# Altium PCB 20K Control Board V1.1.PcbDoc (part 4 of 24)
Units mm, origin at the board's own origin, x right, y up, seen from the top; angles counter-clockwise.
Board outline 132 x 260 mm, 4 copper layers (Top Layer, GND, VCC, Bottom Layer); 1384 components, 779 nets, 4515 pads, 1774 vias.
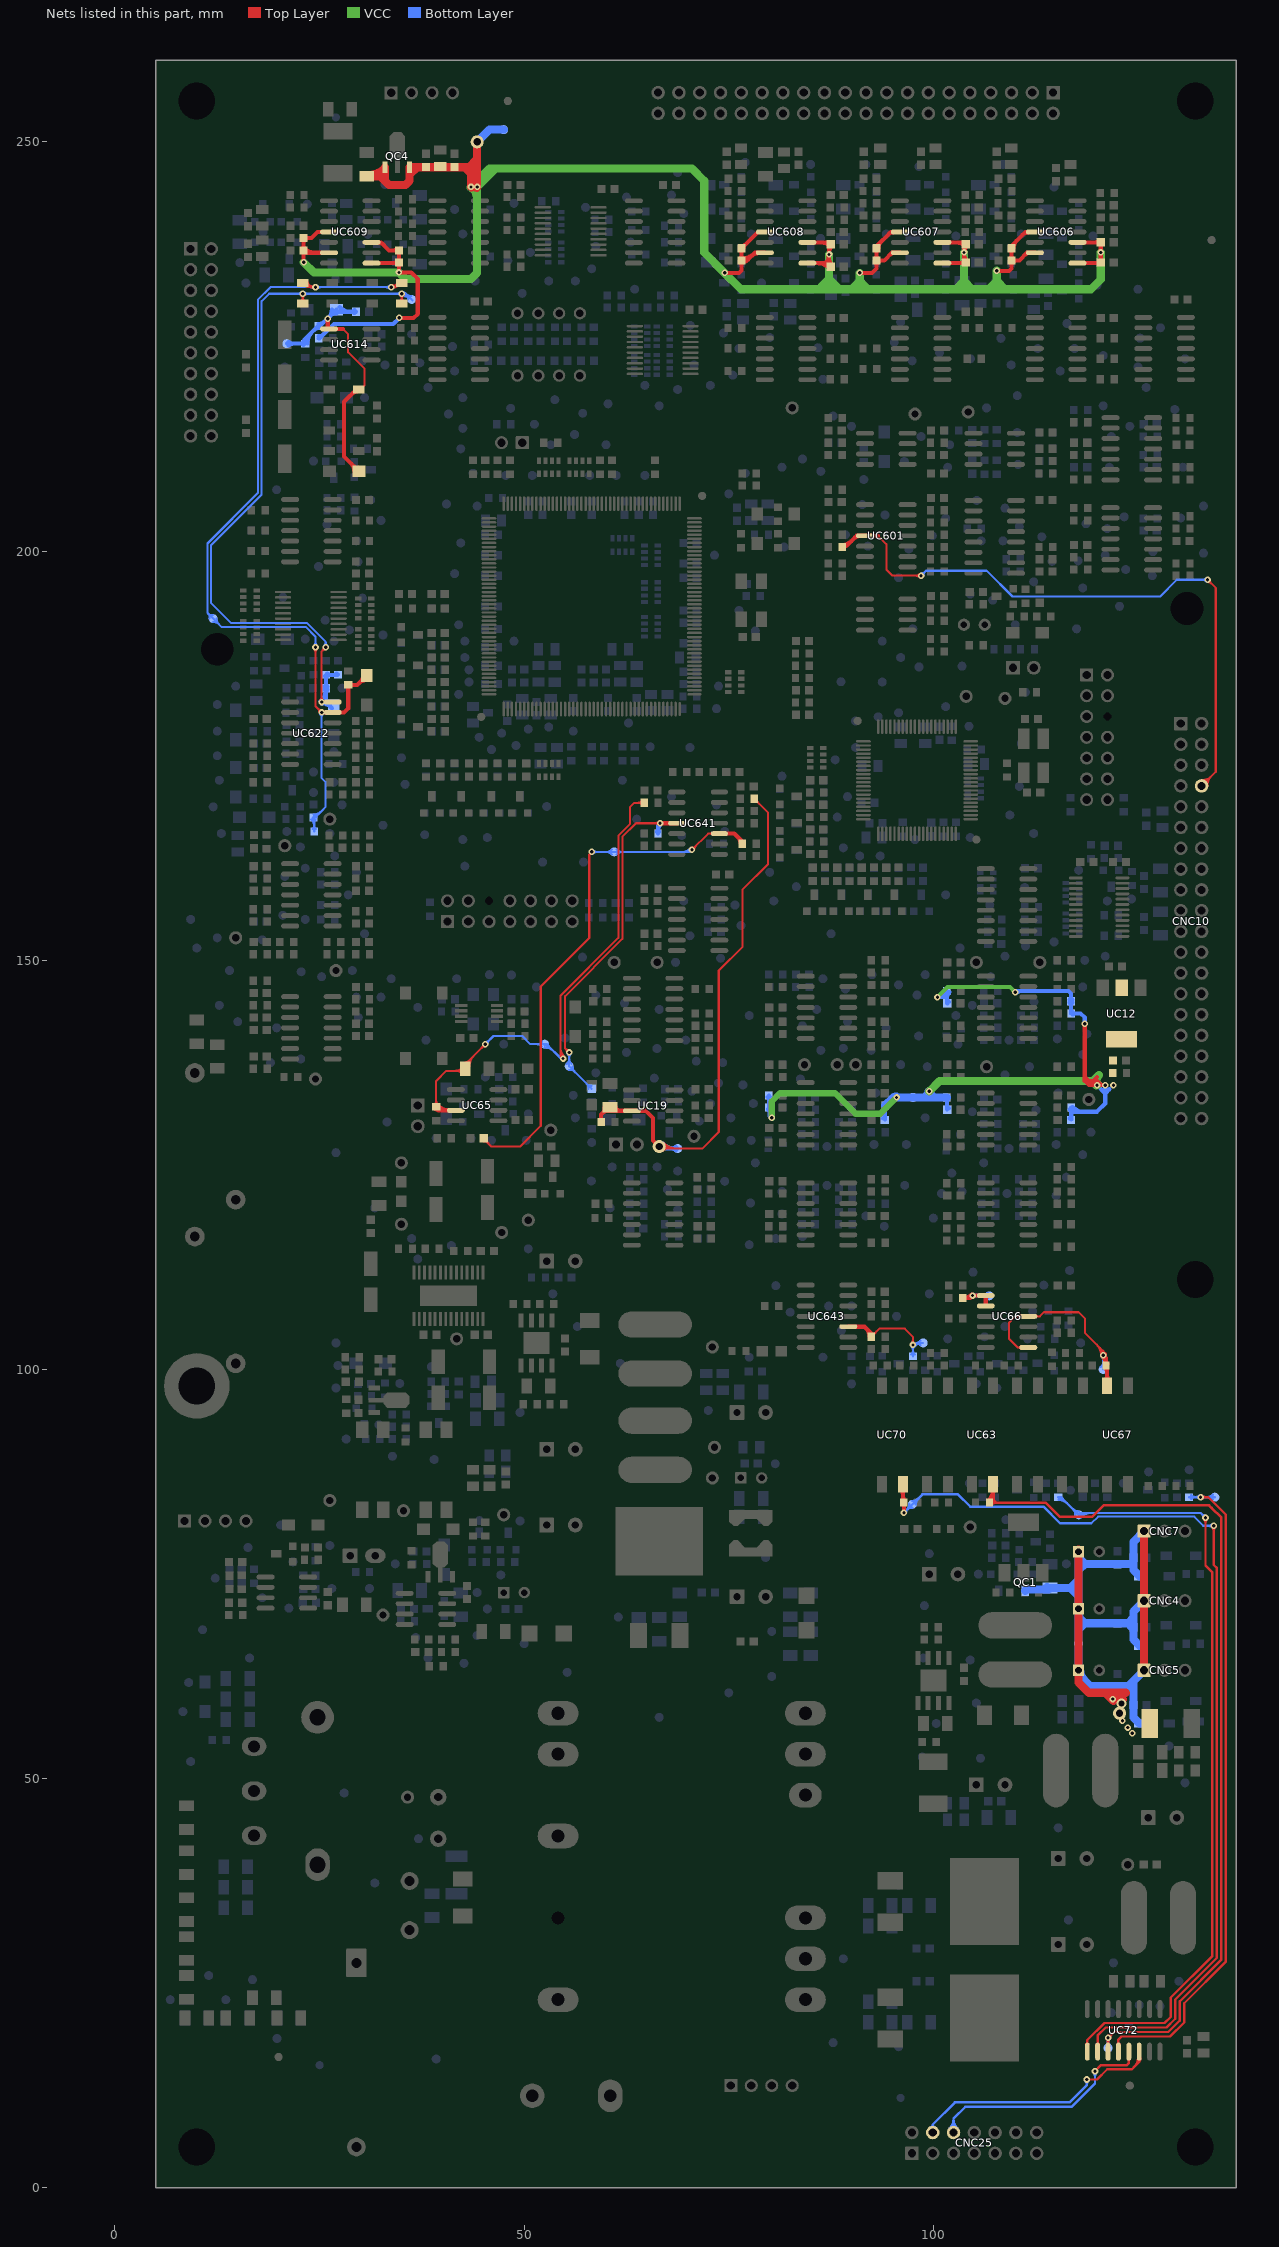
[diagram p6: the nets of this part, all layers, seen from the top]

## Via types
v1: diameter 0.8, hole 0.4, Top Layer to Bottom Layer, tented both sides, 1354 vias
v2: diameter 1.2, hole 0.7, Top Layer to Bottom Layer, 261 vias
v3: diameter 0.8, hole 0.4, Top Layer to Bottom Layer, 58 vias
v4: diameter 1.2, hole 0.7, Top Layer to Bottom Layer, tented top, 58 vias
v5: diameter 0.8, hole 0.4, Top Layer to Bottom Layer, tented top, 22 vias
v6: diameter 1.2, hole 0.7, Top Layer to Bottom Layer, tented both sides, 13 vias
v7: diameter 1.2, hole 0.7, Top Layer to Bottom Layer, tented bottom, 8 vias

## Nets (pads, with @x,y where several pads share a name; then routed paths per layer and width w, separated by ;. In a path a pad name is that pad's centre, name@x,y a point inside that pad or via, vN(x,y) a via of type N, cw(c..) or ccw(c..) an arc to the next point about the centre after c; other vN are vias at no path point)
1.5VREF: CC10.2 CC14.2 CC36.2 CC37.2 CC53.2 CC69.2 CC79.1 pad.ICT@97.5,133.25 RC25.2 RC29.2 RC61.1 RC64.1 RC100.2 RC140.1 RC158.2 UC12.2 | length 132.7
  Top Layer w0.5: v1(118.5,142.25) 118.5,135.75 ; 119,135.25 118.5,135.75 ; 119.827,135.25 cw(c119.827,134.725) v1@120.346,134.8 ; v1@119.852,134.729 ccw(c119.25,134.642) 119.25,135.25 ; 120,135.25 119.25,135.25 ; 120,135.75 119.5,135.25 119.25,135.25 ; v1(121,134.75) v1(120,134.75) 119,134.75 118.5,135.25 ; 118.5,135.25 118.5,135.75 ; 118.5,135.25 119.25,135.25
  VCC w0.5: v1(100.5,145.5) 101.75,146.75 109.35,146.75 v1(110,146.1)
  VCC w0.75: v1(80.25,130.75) 80.25,132.75 81.25,133.75 88,133.75 90.5,131.25 93.5,131.25 v1(95.5,133.25)
  VCC w1: v1(99.5,134) 100.75,135.25 119.5,135.25 ; 119.034,135.25 cw(c119.034,133.784) v1@120.071,134.821 ; v1@119.903,134.725 cw(c121.19,135.06) 120.25,136 119.5,135.25 ; v1(120,134.75) 119.5,135.25 ; v1@120.098,134.772 ccw(c119.5,134.638) 119.5,135.25
  Bottom Layer w0.5: RC100.2@79.759,133.309 cw(c79.417,132.967) 79.9,132.967 cw(c80.383,132.967) RC100.2@80.041,133.309 ; CC53.2@79.773,131.823 cw(c79.226,131.276) 80,131.276 ; CC53.2@79.9,132.05 RC100.2@79.9,133.5 ; 79.9,132.724 ccw(c80.674,132.724) CC53.2@80.127,132.177 ; v1@80,131 CC53.2@80,131.8 ; CC53.2@80,131.716 ccw(c81.216,131.716) v1@80.356,130.856 ; CC69.2@93.873,130.677 ccw(c93.326,131.224) 94.1,131.224 ; RC140.1@93.959,132.059 cw(c93.617,131.717) 94.1,131.717 cw(c94.583,131.717) RC140.1@94.241,132.059 ; CC69.2@94.1,130.55 RC140.1@94.1,132.25 ; v1(100.5,145.5) 101.65,145.5 ; v1(100.5,145.5) ccw(c100.5,146.485) RC29.2@101.456,146.248 ; 101.139,145.5 ccw(c101.139,146.327) RC29.2@101.941,146.128 ; RC25.2@101.509,133.059 cw(c101.167,132.717) 101.65,132.717 cw(c102.133,132.717) RC25.2@101.791,133.059 ; CC10.2@101.65,131.8 RC25.2@101.65,133.25 ; 101.65,132.474 ccw(c102.424,132.474) CC10.2@101.877,131.927 ; CC14.2@101.65,144.8 101.65,145.5 ; 101.65,145.474 ccw(c102.424,145.474) CC14.2@101.877,144.927 ; RC29.2@101.65,146.25 101.65,145.5 ; CC14.2@101.7,144.75 CC14.2@101.75,144.7 ; v1(110,146.1) 110.15,146.25 116.5,146.25 116.8,145.95 CC37.2@116.8,145 RC64.1@116.8,143.55 ; v1@110.106,145.994 cw(c110.724,145.376) 110.724,146.25 ; CC36.2@116.623,130.677 ccw(c116.076,131.224) 116.85,131.224 ; CC37.2@116.623,144.823 cw(c116.196,144.396) 116.8,144.396 cw(c117.404,144.396) CC37.2@116.977,144.823 ; CC37.2@116.623,145.177 ccw(c116.196,145.604) 116.8,145.604 ccw(c117.404,145.604) CC37.2@116.977,145.177 ; RC61.1@116.638,131.738 ccw(c117.212,132.312) RC61.1@117.212,131.5 ; RC61.1@116.709,131.809 cw(c116.367,131.467) 116.85,131.467 cw(c117.333,131.467) RC61.1@116.991,131.809 ; 116.8,144.154 ccw(c117.454,144.154) RC64.1@116.991,143.691 ; CC36.2@116.85,130.55 RC61.1@116.85,132 ; RC61.1@116.85,131.5 120,131.5 121,132.5 121,133.75 ; RC64.1@116.85,143.5 118,143.5 118.5,143 v1(118.5,142.25) ; RC61.1@116.991,132.091 ccw(c118.419,133.519) 118.419,131.5 ; RC64.1@116.991,143.359 cw(c117.333,143.017) 117.333,143.5 cw(c117.333,143.983) RC64.1@116.991,143.641 ; v1(120,134.75) 121,133.75 ; v1(121,134.75) 121,133.75 ; 121.5,134.25 121,133.75 ; RC29.2@101.509,146.059 cw(c101.167,145.717) 101.65,145.717 ; RC29.2@101.509,146.059 cw(c101.167,145.717) 101.65,145.717 ; RC29.2@101.509,146.059 cw(c101.167,145.717) 101.65,145.717 ; RC29.2@101.509,146.059 cw(c101.167,145.717) 101.65,145.717 ; 101.65,145.717 cw(c102.133,145.717) RC29.2@101.791,146.059 ; 101.65,145.717 cw(c102.133,145.717) RC29.2@101.791,146.059 ; 101.65,145.717 cw(c102.133,145.717) RC29.2@101.791,146.059 ; 101.65,145.717 cw(c102.133,145.717) RC29.2@101.791,146.059
  Bottom Layer w0.75: 98.75,133.25 v1(99.5,134) 100.25,133.25
  Bottom Layer w1: RC140.1@94.1,132.25 95.1,133.25 v1(95.5,133.25) 98.75,133.25 ; 94.988,133.138 cw(c95.5,132.626) v1@95.5,133.35 ; v1@99.401,133.986 ccw(c100.25,134.108) 100.25,133.25 ; v1@99.599,133.986 cw(c98.75,134.108) 98.75,133.25 ; RC25.2@101.65,133.25 100.25,133.25 ; 98.75,133.25 100.25,133.25
  other v1: 122,134.75
2V5_REF: CC142.2 CC191.1 CC192.1 CC213.1 CC215.1 CC217.2 CC219.1 CC231.1 CC232.1 CC240.1 CC241.1 CC242.1 CC243.1 CC252.2 CC348.2 CC350.1 CC351.1 CC352.1 CC355.1 pad.ICT@47.5,251.5 QC4.1 QC4.3 RC322.1 RC339.1 TP38.1 UC606.4 UC606.6 UC606.8 UC606.10 UC607.4 UC607.6 UC607.8 UC607.10 UC608.4 UC608.6 UC608.8 UC608.10 UC609.4 UC609.6 UC609.8 UC609.10 | length 355.4
  Top Layer w0.5: CC355.1@22.873,236.573 cw(c22.446,236.146) 23.05,236.146 cw(c23.654,236.146) CC355.1@23.227,236.573 ; CC355.1@22.873,236.927 ccw(c22.446,237.354) 23.05,237.354 ccw(c23.654,237.354) 23.227,236.927 ccw(c24.354,238.054) 24.354,236.46 ; CC350.1@22.873,238.073 cw(c22.446,237.646) 23.05,237.646 cw(c23.654,237.646) 23.227,238.073 cw(c23.654,237.646) 23.654,238.25 cw(c23.654,238.854) CC350.1@23.227,238.427 ; v1(23.05,235.3) CC355.1@23.05,236.75 ; CC355.1@23.46,236.75 23.75,236.46 ; UC609.6@26.15,236.46 23.75,236.46 ; UC609.4@26.15,239 24.75,239 24,238.25 CC350.1@23.05,238.25 CC355.1@23.05,236.75 ; UC609.8@31.35,235.19 CC243.1@34.7,235.19 ; UC609.10@31.35,237.73 32.52,237.73 33.5,236.75 CC219.1@34.7,236.75 CC243.1@34.7,235.25 CC243.1@34.7,235.19 ; UC609.10@32.15,237.68 cw(c32.15,236.666) 32.867,237.383 ; UC609.10@32.164,237.682 cw(c32.32,237.16) 32.705,237.545 ; 33.952,235.19 ccw(c33.952,235.998) 34.523,235.427 ccw(c34.096,235.854) 34.7,235.854 ccw(c35.304,235.854) CC243.1@34.877,235.427 ; CC243.1@34.523,235.073 cw(c34.096,234.646) 34.7,234.646 cw(c35.304,234.646) CC243.1@34.877,235.073 ; CC219.1@34.523,236.927 cw(c34.096,237.354) 34.096,236.75 cw(c34.096,236.146) 34.523,236.573 cw(c34.096,236.146) 34.7,236.146 cw(c35.304,236.146) CC219.1@34.877,236.573 ; v1(34.75,228.5) 36.5,228.5 37,229 37,233.25 36.2,234.05 v1(34.7,234.05) CC243.1@34.7,235.19 ; v1(74.5,234) 76.25,234 76.55,234.3 CC252.2@76.55,235.5 ; CC252.2@76.373,235.323 cw(c75.946,234.896) 76.55,234.896 cw(c77.154,234.896) 76.727,235.323 cw(c77.154,234.896) 77.154,235.5 cw(c77.154,236.104) 76.727,235.677 cw(c77.154,236.104) 76.55,236.104 cw(c75.946,236.104) CC252.2@76.373,235.677 ; CC232.1@76.373,236.823 cw(c75.946,236.396) 76.55,236.396 cw(c77.154,236.396) CC232.1@76.727,236.823 ; CC252.2@76.55,235.25 ccw(c76.55,236.336) 77.318,235.568 ; CC252.2@76.55,235.75 ccw(c76.55,238.043) 78.172,236.422 ; CC232.1@76.55,237.25 ccw(c76.55,237.854) 76.977,237.427 ccw(c77.404,237) CC232.1@76.8,237 ; 77.849,236.099 cw(c78.6,235.348) UC608.6@78.6,236.41 ; 78.015,236.265 cw(c78.425,235.855) UC608.6@78.586,236.412 ; UC608.6@79.4,236.46 78.21,236.46 77.25,235.5 CC252.2@76.55,235.5 ; UC608.4@79.4,239 78.55,239 CC232.1@76.55,237 CC252.2@76.55,235.5 ; UC608.8@84.6,235.19 86.75,235.19 ; UC608.10@84.6,237.73 CC242.1@87.22,237.73 ; 85.784,235.19 cw(c85.784,233.084) CC215.1@87.273,234.573 ; 86.291,237.73 cw(c86.291,236.341) CC242.1@87.273,237.323 ; CC215.1@86.991,235.19 cw(c86.991,234.291) 87.627,234.927 cw(c88.536,235.836) 87.25,235.836 ; 87.03,235.47 ccw(c86.619,235.881) v1@87.121,236.174 ; CC215.1@87.25,234.75 CC242.1@87.25,237.5 ; 87.25,235.69 86.75,235.19 ; v1@87.25,236.414 cw(c88.536,236.414) CC242.1@87.627,237.323 ; CC215.1@87.45,234.75 87.01,235.19 86.75,235.19 ; v1(91,234) 92.5,234 93.05,234.55 CC240.1@93.05,235.5 ; CC240.1@92.873,235.323 cw(c92.446,234.896) 93.05,234.896 cw(c93.654,234.896) 93.227,235.323 cw(c93.654,234.896) 93.654,235.5 cw(c93.654,236.104) 93.227,235.677 cw(c93.654,236.104) 93.05,236.104 cw(c92.446,236.104) CC240.1@92.873,235.677 ; CC352.1@92.873,236.823 cw(c92.446,236.396) 93.05,236.396 cw(c93.654,236.396) CC352.1@93.227,236.823 ; CC352.1@93.3,237 cw(c94.512,237) 93.655,237.857 ; 94.499,238.701 cw(c95.1,238.1) UC607.4@95.1,238.95 ; 94.647,238.849 cw(c94.95,238.546) UC607.4@95.084,238.953 ; 94.776,236.276 cw(c95.1,235.951) UC607.6@95.1,236.41 ; UC607.6@95.9,236.46 94.96,236.46 94,235.5 CC240.1@93.05,235.5 ; UC607.4@95.9,239 94.798,239 93.05,237.252 CC352.1@93.05,237 CC240.1@93.05,235.5 ; UC607.8@101.1,235.19 103.69,235.19 103.75,235.25 103.75,237.7 103.72,237.73 UC607.10@101.1,237.73 ; 102.791,237.73 cw(c102.791,236.341) CC213.1@103.773,237.323 ; 103.202,235.19 ccw(c103.202,235.998) CC351.1@103.773,235.427 ; v1@103.75,236.336 ccw(c105.036,236.336) CC351.1@104.127,235.427 ; v1@103.75,236.414 cw(c105.036,236.414) CC213.1@104.127,237.323 ; v1(107.75,234.25) 109.25,234.25 109.55,234.55 CC241.1@109.55,235.5 ; CC241.1@109.373,235.323 cw(c108.946,234.896) 109.55,234.896 cw(c110.154,234.896) 109.727,235.323 cw(c110.154,234.896) 110.154,235.5 cw(c110.154,236.104) 109.727,235.677 cw(c110.154,236.104) 109.55,236.104 cw(c108.946,236.104) CC241.1@109.373,235.677 ; CC217.2@109.373,236.823 cw(c108.946,236.396) 109.55,236.396 cw(c110.154,236.396) CC217.2@109.727,236.823 ; CC217.2@109.8,237 cw(c111.128,237) 110.189,237.939 ; 110.917,238.667 cw(c111.6,237.984) UC606.4@111.6,238.95 ; 111.075,238.825 cw(c111.436,238.464) UC606.4@111.585,238.952 ; 111.276,236.276 cw(c111.6,235.951) UC606.6@111.6,236.41 ; UC606.4@111.55,239 UC606.4@112.4,239 111.25,239 109.55,237.3 CC217.2@109.55,237 CC241.1@109.55,235.5 ; UC606.6@112.4,236.46 111.46,236.46 110.5,235.5 CC241.1@109.55,235.5 ; UC606.8@117.6,235.19 120.14,235.19 120.45,235.5 CC142.2@120.45,237.75 ; UC606.10@117.6,237.73 CC142.2@120.43,237.73 ; 119.702,235.19 ccw(c119.702,235.998) 120.273,235.427 ccw(c119.846,235.854) 120.45,235.854 ccw(c121.054,235.854) CC231.1@120.627,235.427 ; 119.798,237.73 ccw(c119.798,238.402) CC142.2@120.273,237.927 ; 119.895,237.73 cw(c119.895,237.195) 120.273,237.573 cw(c119.846,237.146) 120.45,237.146 cw(c121.054,237.146) CC142.2@120.627,237.573 ; CC355.1@23.05,236.75 23.34,236.46 23.75,236.46 ; 23.75,236.46 cw(c23.75,236.934) 23.292,236.813 ccw(c23.75,236.934) 23.75,236.46 ; 86.75,235.19 cw(c86.75,234.74) 87.2,234.746 ccw(c86.75,234.74) 86.75,235.19
  Top Layer w1: RC322.1@30.75,245.8 32,245.8 ; RC322.1@31,245.95 ccw(c31,248.726) QC4.1@32.963,246.763 ; QC4.1@32.854,246.637 ccw(c33.517,246.017) 32.875,245.375 ; 33,245.8 32,245.8 ; QC4.1@33,246.8 32,245.8 ; QC4.1@33,246.9 33,245.25 33.5,244.75 ; 36.95,246.95 36,246 ; 42.75,246.9 43.5,246.15 v1(43.5,244.5) v1(44.25,244.5) 44.25,246.9 ; 43.5,245.25 ccw(c44.358,245.25) v1@44.236,244.401 ; 43.5,246.069 ccw(c45.819,246.069) v1@44.179,244.429 ; v1@43.571,244.429 ccw(c41.931,246.069) 44.25,246.069 ; 44.25,247.9 43.25,246.9 ; TP38.1@44.25,250 44.25,246.9 ; 32,245.8 32.45,245.8 33.5,244.75 ; 33.5,244.75 35.5,244.75 36,245.25 36,246 ; 36,246 QC4.3@36,246.9 43.25,246.9 ; 43.25,246.9 44.25,246.9
  VCC w1: v1(23.05,235.3) 24.3,234.05 v1(34.7,234.05) 35.5,233.25 43.5,233.25 44.25,234 v1(44.25,244.5) ; v1@43.445,244.416 ccw(c43.796,244.954) v1(44.25,244.5) ; v1@43.5,244.4 ccw(c43.5,245.969) 44.61,244.86 ; v1@43.514,244.599 cw(c43.392,243.75) 44.25,243.75 v1(43.5,244.5) 45.75,246.75 46.5,246.75 ; v1@43.571,244.571 cw(c41.931,242.931) 44.25,242.931 ; v1@44.15,244.5 cw(c45.719,244.5) 44.61,245.61 ; 86.25,232.25 87.25,233.25 88.25,232.25 ; 87.25,232.5 v1(87.25,236.25) ; 90,232 91,233 92,232 ; 91,232.25 v1(91,234) ; 102.75,232 103.75,233 ; 103.75,232.25 103.75,233 ; v1(103.75,236.5) 103.75,233 ; 104.75,232 103.75,233 ; 106.75,232 107.75,233 108.75,232 ; 107.75,232.25 v1(107.75,234.25) ; v1(120.45,236.5) 120.45,233.2 119.25,232 76.5,232 v1(74.5,234) 72,236.5 72,245.25 70.5,246.75 46.5,246.75 ; v1(44.25,244.5) 46.5,246.75
  Bottom Layer w0.5: RC339.1@24.9,226 25,226 26.75,227.75 ; RC339.1@24.9,226.25 ccw(c24.9,227.095) 25.497,226.497 ; 28,227.75 26.75,227.75 ; v1(34.75,228.5) 34,227.75 26.75,227.75
  Bottom Layer w1: TP38.1@44.25,250 45.75,251.5 pad.ICT@47.5,251.5
12V-UVP: CC202.2 DC32.2 DC33.2 DC44.2 pad.ICT@21,225.35 RC340.1 RC346.2 UC614.1 | length 47.8
  Top Layer w0.25: 27.845,227.155 28.5,226.5 28.5,224.275 30.5,222.275 30.5,220.25 DC44.2@30.25,220
  Top Layer w0.5: UC614.1@26,227.155 v1(26,228.4) ; 26,227.638 ccw(c26.633,227.638) UC614.1@26.185,227.19 ; UC614.1@26.15,227.155 27.845,227.155 ; 28.861,210.689 cw(c27.922,209.75) DC33.2@29.25,209.75 ; 29.003,219.253 cw(c29.6,218.655) DC44.2@29.6,219.5 ; DC33.2@29.103,210.447 ccw(c29.7,211.045) DC33.2@29.7,210.2 ; DC33.2@29.8,209.75 28,211.55 28,218.25 29.55,219.8 DC44.2@29.8,219.8
  Bottom Layer w0.5: pad.ICT@21,225.35 RC346.2@23.25,225.35 23.25,225.936 RC340.1@24.814,227.5 ; pad.ICT@21.212,225.138 cw(c21.724,224.626) 21.724,225.35 cw(c21.724,226.074) pad.ICT@21.212,225.562 ; RC346.2@23,225.35 cw(c23.812,225.35) 23.238,225.924 ; RC346.2@23.059,225.209 ccw(c22.717,224.867) 22.717,225.35 ccw(c22.717,225.833) RC346.2@23.059,225.491 ; RC346.2@23.109,225.491 ccw(c22.767,225.833) 23.25,225.833 ccw(c23.733,225.833) RC346.2@23.391,225.491 ; RC346.2@23.5,225.35 cw(c25.519,225.35) 24.091,226.778 ; 24.361,227.047 cw(c24.85,226.559) RC340.1@24.85,227.25 ; RC340.1@24.832,227.518 RC340.1@24.814,227.5 ; RC340.1@24.85,227.75 ccw(c24.85,228.836) 25.618,228.068 ; 25.659,228.109 cw(c26,227.767) v1@26,228.25 ; v1@26.111,228.561 ccw(c25.172,229.5) DC32.2@26.5,229.5 ; v1@26.15,228.4 cw(c26.633,228.4) 26.291,228.741 ; DC32.2@26.353,228.803 cw(c26.95,228.205) DC32.2@26.95,229.05 ; DC32.2@27.05,229.05 DC32.2@27.05,229.5 25.05,227.5 RC340.1@24.85,227.5 RC340.1@24.814,227.5 ; DC32.2@27.3,229.25 CC202.2@29.45,229.25 ; DC32.2@27.468,229.818 ccw(c28.84,231.19) 28.84,229.25 ; CC202.2@29.273,229.073 ccw(c28.846,228.646) 28.846,229.25 ccw(c28.846,229.854) CC202.2@29.273,229.427
12V_FANOUT: 12V_FANOUT.1 CC22.1 CC25.1 CC28.1 CC50.1 CC51.2 CC74.2 CC81.1 CC194.2 CC197.1 CNC4.1 CNC5.1 CNC7.1 DC3.2 DC4.2 DC5.2 FA2.1 pad.ICT@117.73,66.5 QC1.3 RC47.2 | length 122.7
  Top Layer w1: CC197.1@117.73,78 CC81.1@117.73,70.75 CC50.1@117.73,63.25 117.73,61.77 119,60.5 121,60.5 ; 121.198,60.5 cw(c121.198,57.698) v6@123.179,59.679 ; 121.402,60.098 ccw(c122,60.696) v1@122,59.85 ; v1(121.901,59.734) ccw(c121,59.587) 121,60.5 ; v1@122,59.5 121,60.5 ; v1@122.086,59.699 cw(c123.5,58.852) 123.5,60.5 121,60.5 ; CNC5.1@125.75,63.25 CNC7.1@125.75,80.25
  Bottom Layer w1: QC1.3@111.215,72.968 111.35,73.103 114.053,73.103 RC47.2@114.25,73.3 116.75,73.3 ; 113.162,73.103 ccw(c113.162,74.138) RC47.2@113.894,73.406 ; 117.68,73.3 116.75,73.3 ; 117.73,68.23 118.5,69 ; 117.73,69.77 118.5,69 ; 117.73,72.32 116.75,73.3 ; 117.73,74.28 116.75,73.3 ; 117.73,75.48 118.5,76.25 ; 117.73,77.02 118.5,76.25 ; CC197.1@117.73,77.75 CC50.1@117.73,63.25 117.73,62.77 119.2,61.3 123.75,61.3 ; CC81.1@117.896,70.639 ccw(c118.654,70.134) 118.01,69.49 ; CC197.1@117.916,77.676 ccw(c118.832,77.312) 118.135,76.615 ; CC50.1@117.93,63.25 ccw(c119.572,63.25) 118.411,62.089 ; 123.8,61.3 124.45,61.95 ; 124.25,61.3 123.75,61.3 ; CC25.1@124.25,68.5 123.75,69 ; 124.45,60.6 123.75,61.3 ; 124.45,69 123.75,69 ; 124.45,69.7 123.75,69 ; DC5.2@125.2,56.75 124.45,57.5 CC28.1@124.45,59 124.45,61.95 ; DC3.2@125.2,66.25 124.45,67 124.45,70.45 CNC4.1@125.75,71.75 ; DC4.2@125.2,74.75 124.45,75.5 124.45,76.25 ; CNC5.1@125.75,63.25 124.45,61.95 ; CNC7.1@125.75,80.25 124.45,78.95 124.45,77.75 124.45,76.25 ; 118.5,69 123.75,69 ; 118.5,76.25 124.45,76.25
  other v1: 124.3,55.55 123.75,56.25 123.1,57.1
  other v6: 123,59.2
50MA.ON: CNC10.8 RC238.1 UC601.4 | length 88.9
  Top Layer w0.25: 93.239,201.875 94.25,200.864 94.25,197.75 95,197 v1(98.5,197) ; v1@98.306,196.806 ccw(c97.836,196.336) 97.836,197 ccw(c97.836,197.664) v1@98.306,197.194 ; CNC10.8@132.77,171.31 134.5,173.04 134.5,195.5 v1(133.5,196.5) ; CNC10.8@132.77,171.76 ccw(c132.77,172.846) 133.538,172.078 ccw(c134.306,171.31) CNC10.8@133.22,171.31 ; CNC10.8@132.77,172.01 ccw(c132.77,173.7) 133.965,172.505 ccw(c135.16,171.31) CNC10.8@133.47,171.31 ; v1@133.5,196.225 cw(c133.5,195.561) 133.969,196.031 cw(c134.439,196.5) v1@133.775,196.5
  Top Layer w0.5: RC238.1@88.85,200.75 ccw(c88.85,202.319) 89.96,201.21 ; RC238.1@88.969,200.711 ccw(c89.212,201.038) 89.5,200.75 ; RC238.1@89.029,200.46 cw(c89.5,200.222) 89.5,200.75 ; RC238.1@89.1,200.75 89.5,200.75 ; 90.381,201.631 cw(c90.85,201.161) UC601.4@90.85,201.825 ; 93.239,201.875 UC601.4@91.65,201.875 90.625,201.875 89.5,200.75
  Bottom Layer w0.25: v1(98.5,197) 99.1,197.6 106.514,197.6 109.664,194.45 127.7,194.45 129.75,196.5 v1(133.5,196.5) ; v1@98.5,197.275 ccw(c98.5,197.939) 98.969,197.469 ccw(c99.439,197) v1@98.775,197 ; v1@133.306,196.306 ccw(c132.836,195.836) 132.836,196.5 ccw(c132.836,197.164) v1@133.306,196.694
232-RX: pad.ICT@120.75,100 RC628.1 UC66.8 UC66.11 UC67.4 | length 44.5
  Top Layer w0.25: UC66.8@110.676,102.566 ccw(c110.378,102.268) 110.378,102.69 ccw(c110.378,103.112) UC66.8@110.676,102.814 ; UC66.11@110.676,106.376 ccw(c110.378,106.078) 110.378,106.5 ccw(c110.378,106.922) UC66.11@110.676,106.624 ; UC66.8@111.6,102.69 110.285,102.69 109.25,103.725 109.25,105.75 110,106.5 UC66.11@111.6,106.5 113,106.5 113.5,107 117.75,107 118.5,106.25 118.5,104.5 120.75,102.25 ; UC66.11@112.524,106.376 cw(c112.822,106.078) 112.822,106.5 cw(c112.822,106.922) UC66.11@112.524,106.624 ; 119.927,103.073 cw(c118.604,101.75) v1@120.475,101.75 ; 120.354,102.646 cw(c119.458,101.75) v1@120.725,101.75 ; v1@120.579,101.535 cw(c119.715,100.452) RC628.1@121.1,100.452 ; v1@120.603,101.982 ccw(c120.433,102.25) 120.75,102.25 ; 120.699,102.301 cw(c120.413,102.016) v1@120.73,101.765 ; v1@120.734,101.73 cw(c120.129,100.971) RC628.1@121.1,100.971 ; v1(120.75,101.75) 120.75,102.25 ; 120.781,102.219 cw(c120.311,101.75) v1@120.975,101.75 ; RC628.1@120.87,100.78 ccw(c120.315,101.335) 121.1,101.335 ccw(c121.885,101.335) RC628.1@121.33,100.78 ; v1@120.89,101.926 cw(c120.543,101.49) 121.1,101.49 ; v1@120.897,101.982 cw(c121.067,102.25) 120.75,102.25 ; RC628.1@121.1,100.5 121.1,101.9 120.75,102.25
  Top Layer w0.5: v1@120.644,101.644 cw(c119.543,100.543) RC628.1@121.1,100.543 ; v1(120.75,101.75) 121.1,101.4 RC628.1@121.1,100.5 ; RC628.1@120.959,100.309 cw(c120.303,99.653) 121.23,99.653 ; RC628.1@120.959,100.691 ccw(c120.617,101.033) 121.1,101.033 ccw(c121.583,101.033) RC628.1@121.241,100.691 ; UC67.4@120.983,98.647 ccw(c120.385,99.245) 121.23,99.245 ccw(c122.075,99.245) UC67.4@121.477,98.647 ; UC67.4@121.23,98 RC628.1@121.23,100.37
  Bottom Layer w0.25: pad.ICT@120.449,100.301 ccw(c119.724,101.026) 120.75,101.026 ccw(c121.776,101.026) pad.ICT@121.051,100.301 ; v1@120.556,101.556 cw(c120.086,101.086) 120.75,101.086 cw(c121.414,101.086) v1@120.944,101.556 ; pad.ICT@120.75,100 v1(120.75,101.75)
232-TX: pad.ICT@106.816,109 RC604.2 UC66.2 UC66.3 | length 9.1
  Top Layer w0.5: RC604.2@103.6,108.75 104.5,108.75 v1(104.79,109.04) UC66.2@106.4,109.04 UC66.3@106.4,107.77 ; RC604.2@103.728,108.75 ccw(c103.728,110.102) v1@104.684,109.146 ; RC604.2@103.741,108.609 cw(c104.083,108.267) 104.083,108.75 cw(c104.083,109.233) RC604.2@103.741,108.891
  Bottom Layer w0.5: v1(104.79,109.04) pad.ICT@106.776,109.04 ; 105.995,109.04 cw(c105.995,108.179) pad.ICT@106.603,108.788 ; 106.188,109.04 ccw(c106.188,109.628) pad.ICT@106.603,109.212
232-TX-TO-COM: pad.ICT@121.345,17.095 RC608.1 UC63.4 UC72.11 | length 118.8
  Top Layer w0.3: RC608.1@106.85,83.75 RC608.1@106.9,83.75 ; RC608.1@106.9,83.7 107.75,83.7 ; RC608.1@107.062,83.488 cw(c107.574,82.976) 107.574,83.7 cw(c107.574,84.424) RC608.1@107.062,83.912 ; 107.375,84.075 107.75,83.7 ; v1@121.168,18.168 cw(c120.741,17.741) 121.345,17.741 cw(c121.949,17.741) v1@121.522,18.168 ; UC72.11@121.239,17.556 ccw(c120.983,17.812) 121.345,17.812 ccw(c121.707,17.812) UC72.11@121.451,17.556 ; UC72.11@121.345,16.65 v1(121.345,18.345) 122.05,19.05 128.706,19.05 130.1,20.444 130.1,22.794 135.2,27.894 135.2,81.9 134,83.1 133.7,83.4 120.8,83.4 120.5,83.1 119.4,82 115.457,82 113.757,83.7 107.75,83.7 ; v1@121.345,18.595 ccw(c121.345,19.199) 121.772,18.772 ccw(c122.199,18.345) v1@121.595,18.345
  Top Layer w0.5: RC608.1@106.709,83.941 ccw(c105.353,85.297) UC63.4@107.27,85.297 ; RC608.1@106.85,83.75 107.27,84.17 UC63.4@107.27,86 ; UC63.4@107.023,85.353 cw(c106.425,84.755) 107.27,84.755 cw(c108.115,84.755) UC63.4@107.517,85.353 ; RC608.1@107.062,83.588 ccw(c106.56,84.09) RC608.1@107.27,84.09
  Bottom Layer w0.3: pad.ICT@121.062,17.378 ccw(c120.379,18.061) 121.345,18.061 ccw(c122.311,18.061) pad.ICT@121.628,17.378 ; v1@121.168,18.168 cw(c120.741,17.741) 121.345,17.741 cw(c121.949,17.741) v1@121.522,18.168 ; pad.ICT@121.345,17.095 v1(121.345,18.345)
#232-TX-TO-COM: CNC25.4 UC72.14 | length 35.1
  Top Layer w0.3: v1(118.75,13.25) 120,13.25 121.25,14.5 124.25,14.5 124.584,14.834 ; UC72.14@125.005,15.85 cw(c123.569,15.85) 124.584,14.834 ; UC72.14@125.049,15.744 cw(c124.793,15.488) 125.155,15.488 cw(c125.517,15.488) UC72.14@125.261,15.744 ; 125.096,15.346 ccw(c124.593,15.85) UC72.14@125.305,15.85 ; UC72.14@125.155,16.65 125.155,15.405 124.584,14.834
  Bottom Layer w0.3: CNC25.4@99.679,7.401 ccw(c99.546,7.75) 99.92,7.75 ; CNC25.4@99.92,6.77 99.92,7.75 ; CNC25.4@100.161,7.401 cw(c100.294,7.75) 99.92,7.75 ; v1@118.573,13.073 cw(c118.146,12.646) 118.75,12.646 cw(c119.354,12.646) v1@118.927,13.073 ; v1(118.75,13.25) 118.75,12.556 116.644,10.45 102.62,10.45 99.92,7.75
##TODSP-RX: pad.ICT@134.4,84.4 RC626.2 UC72.12 | length 87.7
  Top Layer w0.3: UC72.12@122.509,17.556 ccw(c122.253,17.812) 122.615,17.812 ccw(c122.977,17.812) UC72.12@122.721,17.556 ; UC72.12@122.615,16.65 122.615,18.115 123,18.5 128.933,18.5 130.65,20.217 130.65,22.567 135.75,27.667 135.75,82.25 133.6,84.4 v1(132.65,84.4) ; v1@132.827,84.223 cw(c133.254,83.796) 133.254,84.4 cw(c133.254,85.004) v1@132.827,84.577
  Bottom Layer w0.3: RC626.2@131.25,84.4 v1(132.65,84.4) pad.ICT@134.4,84.4 ; RC626.2@131.512,84.188 cw(c132.024,83.676) 132.024,84.4 cw(c132.024,85.124) RC626.2@131.512,84.612 ; v1@132.473,84.223 ccw(c132.046,83.796) 132.046,84.4 ccw(c132.046,85.004) v1@132.473,84.577 ; v1@132.827,84.223 cw(c133.254,83.796) 133.254,84.4 cw(c133.254,85.004) v1@132.827,84.577 ; pad.ICT@134.117,84.117 ccw(c133.434,83.434) 133.434,84.4 ccw(c133.434,85.366) pad.ICT@134.117,84.683
#DSP-STATE: pad.ICT@98.75,103.25 RC606.1 RC663.1 UC643.10 | length 22
  Top Layer w0.25: RC663.1@92.4,104 93.4,105 96.5,105 97.5,104 v1(97.5,103) ; RC663.1@92.4,104.375 ccw(c92.4,105.28) 93.04,104.64 ; RC663.1@92.725,104.05 cw(c93.389,104.05) 92.919,104.519 ; v1@97.306,103.194 ccw(c96.836,103.664) 97.5,103.664 ccw(c98.164,103.664) v1@97.694,103.194
  Top Layer w0.5: UC643.10@89.6,105.23 91.582,105.23 RC663.1@92.481,104.331 ; 91.803,105.009 cw(c90.844,104.05) RC663.1@92.2,104.05
  Bottom Layer w0.25: RC606.1@97.27,101.83 ccw(c96.715,102.385) 97.5,102.385 ccw(c98.285,102.385) RC606.1@97.73,101.83 ; v1@97.306,102.806 cw(c96.836,102.336) 97.5,102.336 cw(c98.164,102.336) v1@97.694,102.806 ; RC606.1@97.5,101.6 v1(97.5,103) v1@97.75,103.25 ; v1@97.518,102.982 cw(c98.155,102.358) 98.155,103.25 ; v1@97.696,102.807 cw(c98.75,101.775) pad.ICT@98.75,103.25 ; pad.ICT@98.444,102.955 ccw(c97.75,102.286) v1@97.75,103.25 ; pad.ICT@98.444,103.545 cw(c97.75,104.214) v1@97.75,103.25 ; pad.ICT@98.75,103.25 v1@97.75,103.25
#M.DSP_RDY: CC104.2 pad.ICT@55.5,137.05 RC267.1 UC641.4 | length 53.4
  Top Layer w0.25: v1@55.225,138.75 ccw(c54.561,138.75) 55.031,139.219 ccw(c55.5,139.689) v1@55.5,139.025 ; v1@55.375,138.625 v1@55.5,138.5 ; v1(55.5,138.75) 55,139.25 55,145.614 62,152.614 62,165.088 63.662,166.75 v1(66.6,166.75) ; v1@66.406,166.556 ccw(c65.936,166.086) 65.936,166.75 ccw(c65.936,167.414) v1@66.406,166.944
  Top Layer w0.5: v1(66.6,166.75) UC641.4@68.65,166.75
  Bottom Layer w0.25: pad.ICT@55.199,137.351 ccw(c54.474,138.076) 55.5,138.076 ccw(c56.526,138.076) pad.ICT@55.801,137.351 ; v1@55.306,138.556 cw(c54.836,138.086) 55.5,138.086 cw(c56.164,138.086) v1@55.694,138.556 ; pad.ICT@55.5,136.625 cw(c55.5,135.599) 56.226,136.324 cw(c56.951,137.05) pad.ICT@55.925,137.05 ; v1(55.5,138.75) pad.ICT@55.5,137.05 CC104.2@58.25,134.3 ; CC104.2@57.875,134.3 ccw(c56.97,134.3) 57.61,134.94 ccw(c58.25,135.58) CC104.2@58.25,134.675
  Bottom Layer w0.5: RC267.1@66.209,165.691 ccw(c65.867,166.033) 66.35,166.033 ccw(c66.833,166.033) RC267.1@66.491,165.691 ; RC267.1@66.35,165.5 66.35,166.5 v1(66.6,166.75) ; RC267.1@66.35,165.784 cw(c67.566,165.784) v1@66.706,166.644
#MDSP_OK: pad.ICT@68.75,127 RC204.1 RC205.2 RC664.1 TP25.1 UC19.3 | length 80
  Top Layer w0.25: TP25.1@66.5,127.5 67,127 71.75,127 73.775,129.025 73.775,148.753 76.7,151.678 76.7,158.675 79.8,161.775 79.8,168.05 RC664.1@78.35,169.5 ; TP25.1@66.624,127.374 ccw(c67.526,128.276) 67.526,127 ccw(c67.526,126.224) TP25.1@66.977,126.773 ; TP25.1@66.801,127.551 ccw(c68.13,128.88) 68.13,127 ; TP25.1@66.977,127.727 ccw(c68.733,129.483) 68.733,127 ; RC664.1@78.1,169.375 cw(c78.1,168.47) 78.74,169.11 ; RC664.1@78.425,169.7 ccw(c79.089,169.7) 78.619,169.231
  Top Layer w0.5: RC205.2@59.259,130.441 ccw(c58.917,130.783) 59.4,130.783 ccw(c59.883,130.783) RC205.2@59.541,130.441 ; RC205.2@59.4,130.25 59.4,131.15 59.865,131.615 61.75,131.615 ; 59.532,131.282 ccw(c58.764,132.05) RC204.1@59.85,132.05 ; RC204.1@59.653,131.403 cw(c60.25,130.805) RC204.1@60.25,131.65 ; RC204.1@60.815,131.615 61.75,131.615 ; TP25.1@66.5,127.25 65.75,128 65.75,130.75 64.885,131.615 UC19.3@63.15,131.615 61.75,131.615 ; 61.75,131.615 cw(c61.75,132.231) 61.144,132.121 ccw(c61.75,132.231) 61.75,131.615
  Bottom Layer w0.5: TP25.1@66.5,127.5 67,127 pad.ICT@68.75,127 ; TP25.1@66.889,127.639 ccw(c68.431,129.181) pad.ICT@68.431,127 ; pad.ICT@68.538,126.788 ccw(c68.026,126.276) 68.026,127 ccw(c68.026,127.724) pad.ICT@68.538,127.212
#PV1-OCP: CC345.1 DC36.2 DC39.2 DC50.2 pad.ICT@36.25,230.75 RC460.2 RC474.1 UC622.14 | length 118.1
  Top Layer w0.25: DC39.2@22.685,230.515 ccw(c22.045,231.155) 22.95,231.155 ccw(c23.855,231.155) DC39.2@23.215,230.515 ; v1@22.756,231.256 cw(c22.286,230.786) 22.95,230.786 cw(c23.614,230.786) v1@23.144,231.256 ; DC39.2@22.95,230.25 v1(22.95,231.45) ; v1@25.056,181.754 ccw(c24.586,182.224) 25.25,182.224 ccw(c25.914,182.224) v1@25.444,181.754 ; v1(25.25,181.56) 25.25,187.75 v1(25.75,188.25) ; v1@25.475,188.25 cw(c24.811,188.25) 25.281,187.781 cw(c25.75,187.311) v1@25.75,187.975 ; DC36.2@34.75,230.25 DC36.2@35.05,230.25 v1(35.05,231.45) ; DC36.2@34.785,230.515 ccw(c34.145,231.155) 35.05,231.155 ccw(c35.955,231.155) DC36.2@35.315,230.515 ; v1@34.856,231.256 cw(c34.386,230.786) 35.05,230.786 cw(c35.714,230.786) v1@35.244,231.256
  Top Layer w0.5: v1(25.25,181.56) UC622.14@26.6,181.56
  Bottom Layer w0.25: v1@22.756,231.256 ccw(c22.286,230.786) 22.286,231.45 ccw(c22.286,232.114) v1@22.756,231.644 ; v1@23.144,231.256 cw(c23.614,230.786) 23.614,231.45 cw(c23.614,232.114) v1@23.144,231.644 ; v1@25.556,188.444 ccw(c25.086,188.914) 25.75,188.914 ccw(c26.414,188.914) v1@25.944,188.444 ; v1(25.75,188.25) 25.75,188.936 23.486,191.2 14.186,191.2 11.75,193.636 11.75,200.75 17.918,206.918 17.918,230.532 18.836,231.45 v1(22.95,231.45) v1(35.05,231.45) 35.55,231.45 ; v1@34.856,231.256 ccw(c34.386,230.786) 34.386,231.45 ccw(c34.386,232.114) v1@34.856,231.644 ; v1@35.05,231.175 cw(c35.05,229.304) pad.ICT@36.373,230.627 ; v1@35.05,231.425 cw(c35.05,230.158) pad.ICT@35.946,231.054 ; v1@35.05,231.675 cw(c35.05,231.011) 35.519,231.481 ; v1@35.065,231.43 cw(c35.316,231.113) 35.601,231.399 ; v1@35.22,231.234 cw(c35.491,230.891) 35.8,231.2 ; v1@35.282,231.303 cw(c35.55,231.133) 35.55,231.45 ; v1@35.282,231.597 ccw(c35.55,231.767) 35.55,231.45 ; pad.ICT@35.825,230.761 ccw(c34.885,230.785) 35.55,231.45 ; pad.ICT@36.239,231.175 cw(c36.215,232.115) 35.55,231.45 ; pad.ICT@36.25,230.75 35.55,231.45
  Bottom Layer w0.5: v1@25.144,181.666 ccw(c23.56,183.25) CC345.1@25.8,183.25 ; v1@25.25,181.41 cw(c25.25,179.865) DC50.2@26.343,180.957 ; v1@25.302,181.419 cw(c25.545,180.755) 26.045,181.255 ; CC345.1@25.623,183.073 cw(c25.196,182.646) 25.8,182.646 cw(c26.404,182.646) CC345.1@25.977,183.073 ; CC345.1@25.623,183.427 ccw(c25.196,183.854) 25.8,183.854 ccw(c26.404,183.854) CC345.1@25.977,183.427 ; RC460.2@25.659,184.759 cw(c25.317,184.417) 25.8,184.417 cw(c26.283,184.417) RC460.2@25.941,184.759 ; 25.74,181.56 v1(25.25,181.56) 25.8,182.11 ; RC460.2@25.941,185.041 ccw(c26.404,185.504) 26.404,184.85 ; DC50.2@26.5,180.8 25.8,181.5 CC345.1@25.8,183.25 ; 26.596,184.85 ccw(c26.596,185.504) RC474.1@27.059,185.041 ; RC474.1@27.25,184.9 27.2,184.85 25.8,184.85 CC345.1@25.8,183.25
#PV2-OCP: CC344.1 DC31.2 DC40.2 DC49.2 pad.ICT@12,191.75 RC457.2 RC473.1 UC622.13 | length 138.5
  Top Layer w0.25: DC40.2@22.95,232.75 23.25,232.75 23.75,232.25 v1(24.5,232.25) cw(c24.5,233.354) DC40.2@23.492,232.903 ; DC40.2@23.036,232.699 ccw(c23.729,233.009) 23.729,232.25 ; DC40.2@23.264,232.801 ccw(c24.114,233.181) v1@24.114,232.25 ; DC40.2@23.525,232.75 ccw(c24.189,232.75) 23.719,232.281 ; v1@24.306,188.056 cw(c23.836,187.586) 24.5,187.586 cw(c25.164,187.586) v1@24.694,188.056 ; v1@24.306,232.056 ccw(c23.836,231.586) 23.836,232.25 ccw(c23.836,232.914) v1@24.306,232.444 ; v1(24.5,188.25) 24.5,181.04 v1(25.25,180.29) ; v1@24.975,180.29 ccw(c24.311,180.29) 24.781,180.759 ccw(c25.25,181.229) v1@25.25,180.565 ; v1@33.757,232.274 ccw(c33.954,232.949) DC31.2@34.452,232.452 ; v1@33.827,232.514 ccw(c34.089,233.41) DC31.2@34.75,232.75 ; v1@33.982,232.103 cw(c34.25,231.933) 34.25,232.25 ; v1@33.982,232.397 ccw(c34.25,232.567) 34.25,232.25 ; v1@34.064,232.25 ccw(c34.064,232.931) DC31.2@34.728,232.778 ; 34.2,232.2 cw(c34.664,231.737) DC31.2@34.782,232.381 ; 34.281,232.281 ccw(c33.811,232.75) DC31.2@34.475,232.75 ; DC31.2@34.485,232.834 cw(c33.75,233.004) v1(33.75,232.25) 34.25,232.25 ; DC31.2@35.05,232.75 DC31.2@34.75,232.75 ; 34.25,232.25 DC31.2@34.75,232.75
  Top Layer w0.5: v1(25.25,180.29) UC622.13@26.6,180.29 27.999,180.29 28.5,180.791 RC473.1@28.5,183.65 29.6,183.65 DC49.2@30.75,184.8 ; RC473.1@28.359,183.509 cw(c28.017,183.167) 28.5,183.167 cw(c28.983,183.167) RC473.1@28.641,183.509 ; RC473.1@28.691,183.509 cw(c29.033,183.167) 29.033,183.65 cw(c29.033,184.133) RC473.1@28.691,183.791 ; 29.811,183.861 cw(c30.75,182.922) DC49.2@30.75,184.25 ; DC49.2@30.053,184.103 ccw(c29.455,184.7) DC49.2@30.3,184.7
  Bottom Layer w0.25: pad.ICT@11.575,191.761 ccw(c10.635,191.785) 11.3,192.45 ; pad.ICT@11.989,192.175 cw(c11.965,193.115) 11.3,192.45 ; pad.ICT@12,191.325 cw(c12,190.299) 12.726,191.024 cw(c13.451,191.75) pad.ICT@12.425,191.75 ; CC344.1@23.985,167.185 cw(c23.103,166.303) 24.35,166.303 ; RC457.2@24.12,166.03 ccw(c23.565,166.585) 24.35,166.585 ccw(c25.135,166.585) RC457.2@24.58,166.03 ; CC344.1@24.162,167.362 cw(c23.707,166.907) 24.35,166.907 ; CC344.1@24.25,167.575 ccw(c24.25,168.36) 24.805,167.805 ; CC344.1@24.25,167.825 ccw(c24.25,169.213) 25.232,168.232 ; v1@24.306,188.444 ccw(c23.836,188.914) 24.5,188.914 ccw(c25.164,188.914) v1@24.694,188.444 ; v1@24.306,232.056 ccw(c23.836,231.586) 23.836,232.25 ccw(c23.836,232.914) v1@24.306,232.444 ; RC457.2@24.35,165.75 24.35,167.35 25.25,168.25 25.75,168.75 25.75,171.75 25.25,172.25 v1(25.25,180.29) ; 24.35,166.786 cw(c24.914,166.786) CC344.1@24.515,167.185 ; v1(24.5,188.25) 24.5,189.55 23.3,190.75 13,190.75 11.3,192.45 ; CC344.1@24.625,167.45 cw(c25.047,167.45) CC344.1@24.749,167.749 ; v1@24.694,232.056 cw(c25.164,231.586) 25.164,232.25 cw(c25.164,232.914) v1@24.694,232.444 ; v1@25.056,180.096 cw(c24.586,179.626) 25.25,179.626 cw(c25.914,179.626) v1@25.444,180.096 ; v1@33.556,232.056 ccw(c33.086,231.586) 33.086,232.25 ccw(c33.086,232.914) v1@33.556,232.444 ; v1(33.75,232.25) v1(24.5,232.25) 19,232.25 17.468,230.718 17.468,207.104 11.3,200.936 11.3,192.45
#RX-FROM-PC: pad.ICT@117.75,82.25 RC643.2 UC72.9 | length 104.6
  Top Layer w0.3: UC72.9@118.699,17.556 ccw(c118.443,17.812) 118.805,17.812 ccw(c119.167,17.812) UC72.9@118.911,17.556 ; UC72.9@118.805,16.65 118.805,18.055 120.9,20.15 128.25,20.15 129,20.9 129,23.25 134.1,28.35 134.1,75.2 133.25,76.05 133.25,81.296 ; v1@133.073,81.723 cw(c132.646,81.296) 133.25,81.296 ; v1@133.427,81.723 ccw(c133.854,81.296) 133.25,81.296
  Bottom Layer w0.25: pad.ICT@117.75,82.25 117.975,82.475 132.675,82.475 v1(133.25,81.9) ; pad.ICT@117.874,82.126 cw(c118.716,81.284) 118.716,82.475 ; pad.ICT@118.051,81.949 cw(c119.319,80.681) 119.319,82.475 ; v1@132.975,81.9 ccw(c132.311,81.9) 132.781,82.369 ccw(c133.25,82.839) v1@133.25,82.175
  Bottom Layer w0.3: RC643.2@115.25,84.4 115.6,84.4 pad.ICT@117.75,82.25 pad.ICT@117.85,82.35 ; RC643.2@115.3,84.1 cw(c115.3,82.651) 116.324,83.676 ; RC643.2@115.3,84.4 cw(c115.3,83.676) 115.812,84.188 ; 117.067,82.933 cw(c116.384,82.25) 117.35,82.25 ccw(c116.384,82.25) 117.067,82.933 ; 117.067,82.933 ccw(c117.75,83.616) 117.75,82.65 cw(c117.75,83.616) 117.067,82.933
#S.DSP_RDY: CC396.2 pad.ICT@61,163.25 RC659.2 UC641.10 | length 74.4
  Top Layer w0.25: CC396.2@44.8,128.25 45,128.25 46,127.25 49.5,127.25 52.025,129.775 52.025,146.8 57.95,152.725 57.95,162.95 v1(58.25,163.25) ; CC396.2@45.05,127.875 cw(c45.05,127.09) 45.605,127.645 ; CC396.2@45.425,128.25 ccw(c46.451,128.25) 45.726,127.524 ; v1(70.5,163.5) 72.48,165.48 UC641.10@73.85,165.48 ; v1@70.5,163.775 ccw(c70.5,164.439) 70.969,163.969 ccw(c71.439,163.5) v1@70.775,163.5 ; UC641.10@72.976,165.356 ccw(c72.678,165.058) 72.678,165.48 ccw(c72.678,165.902) UC641.10@72.976,165.604
  Top Layer w0.5: UC641.10@73.85,165.48 75.67,165.48 76.65,164.5 RC659.2@76.65,164.25 ; 76.167,164.983 cw(c75.484,164.3) RC659.2@76.45,164.3
  Bottom Layer w0.25: v1(58.25,163.25) v1@70.25,163.25 ; v1@58.444,163.056 cw(c58.914,162.586) 58.914,163.25 cw(c58.914,163.914) v1@58.444,163.444 ; pad.ICT@60.699,162.949 ccw(c59.974,162.224) 59.974,163.25 ccw(c59.974,164.276) pad.ICT@60.699,163.551 ; pad.ICT@61.301,162.949 cw(c62.026,162.224) 62.026,163.25 cw(c62.026,164.276) pad.ICT@61.301,163.551 ; 69.233,163.25 ccw(c69.233,164.767) v1@70.306,163.694 ; 69.836,163.25 ccw(c69.836,164.164) v1@70.482,163.518
#SCI_TX-TO-PC: pad.ICT@97.435,83.535 RC650.1 UC70.4 UC72.10 | length 128.8
  Top Layer w0.3: UC72.10@119.969,17.556 ccw(c119.713,17.812) 120.075,17.812 ccw(c120.437,17.812) UC72.10@120.181,17.556 ; UC72.10@120.075,16.65 120.075,18.618 121.057,19.6 128.478,19.6 129.55,20.672 129.55,23.022 134.65,28.122 134.65,75.75 134.25,76.15 134.25,80.296 ; v1@134.073,80.723 cw(c133.646,80.296) 134.25,80.296 ; v1@134.427,80.723 ccw(c134.854,80.296) 134.25,80.296
  Top Layer w0.5: UC70.4@96.023,85.353 cw(c95.425,84.755) 96.27,84.755 cw(c97.115,84.755) UC70.4@96.517,85.353 ; RC650.1@96.259,83.559 cw(c95.917,83.217) 96.4,83.217 cw(c96.883,83.217) RC650.1@96.541,83.559 ; RC650.1@96.27,83.88 UC70.4@96.27,86 ; 96.27,84.597 ccw(c97.197,84.597) RC650.1@96.541,83.941 ; v1(96.4,82.5) RC650.1@96.4,83.75
  Bottom Layer w0.25: 119.3,81.2 120.125,82.025 131.875,82.025 133,80.9
  Bottom Layer w0.3: v1(96.4,82.5) 98.65,84.75 103,84.75 104.5,83.25 113.457,83.25 115.507,81.2 119.3,81.2 ; v1@96.4,82.75 ccw(c96.4,83.354) 96.827,82.927 ccw(c97.254,82.5) v1@96.65,82.5 ; pad.ICT@97.035,83.535 cw(c96.07,83.535) 96.752,82.852 cw(c97.435,82.17) pad.ICT@97.435,83.135 ; pad.ICT@97.435,83.935 ccw(c97.435,84.901) 98.118,84.218 ccw(c98.801,83.535) pad.ICT@97.835,83.535 ; 133,80.9 v1(134.25,80.9) ; 133.646,80.9 cw(c133.646,80.296) 134.073,80.723 ccw(c133.646,80.296) 133.646,80.9 ; 133.646,80.9 ccw(c133.646,81.504) 134.073,81.077 cw(c133.646,81.504) 133.646,80.9
#SDSP_OK: pad.ICT@52.5,139.75 RC280.1 RC504.1 RC599.2 UC65.3 | length 81.3
  Top Layer w0.25: RC599.2@39.02,132.33 ccw(c38.465,132.885) 39.25,132.885 ccw(c40.035,132.885) RC599.2@39.48,132.33 ; RC599.2@39.25,132.1 39.25,135.25 40.5,136.5 RC504.1@42.8,136.5 ; RC504.1@42.429,136.129 ccw(c41.533,135.233) 41.533,136.5 ccw(c41.533,137.767) RC504.1@42.429,136.871 ; RC504.1@42.606,136.306 ccw(c42.136,135.836) 42.136,136.5 ccw(c42.136,137.164) RC504.1@42.606,136.694 ; RC504.1@42.8,136.75 42.8,137.3 v1(45.25,139.75) ; RC504.1@42.8,137.525 ccw(c42.8,138.068) 43.184,137.684 ; RC504.1@43.075,137 cw(c44.463,137) 43.482,137.982 ; RC504.1@43.325,137 cw(c45.317,137) 43.908,138.408 ; v1@44.975,139.75 cw(c44.311,139.75) 44.781,139.281 cw(c45.25,138.811) v1@45.25,139.475 ; 54.45,138.3 54.45,145.7 61.5,152.75 61.5,165.224 62.95,166.674 62.95,168.75 63.45,169.25 RC280.1@64.65,169.25 ; 54.45,138.785 ccw(c55.535,138.785) v1@54.768,138.018 ; 54.45,139.388 ccw(c56.138,139.388) v1@54.944,138.194 ; RC280.1@64.42,169.02 ccw(c63.865,168.465) 63.865,169.25 ccw(c63.865,170.035) RC280.1@64.42,169.48
  Top Layer w0.5: RC599.2@39.088,131.888 ccw(c39.626,132.426) RC599.2@39.626,131.665 ; RC599.2@39.25,132.1 39.685,131.665 UC65.3@41.65,131.665 ; RC599.2@39.441,132.241 ccw(c40.833,133.633) UC65.3@40.833,131.665
  Bottom Layer w0.25: v1(45.25,139.75) 46.25,140.75 49.75,140.75 50.75,139.75 52.25,139.75 52.75,139.75 54.5,138 v1(54.75,138) ; v1@45.25,140.025 ccw(c45.25,140.689) 45.719,140.219 ccw(c46.189,139.75) v1@45.525,139.75 ; pad.ICT@52.199,139.449 ccw(c51.474,138.724) 51.474,139.75 ccw(c51.474,140.776) pad.ICT@52.199,140.051 ; pad.ICT@52.5,139.325 cw(c52.5,137.695) 53.652,138.848 ; pad.ICT@52.5,139.575 cw(c52.5,138.549) 53.226,139.274 ; pad.ICT@52.925,139.75 ccw(c53.347,139.75) 53.049,139.451 ; 53.854,138.646 ccw(c54.75,139.542) v1@54.75,138.275 ; 54.281,138.219 ccw(c54.75,138.689) v1@54.75,138.025
#TODSP-RX: CNC25.6 UC72.13 | length 33.7
  Top Layer w0.3: v1(119.75,14.25) 120.5,15 123.635,15 123.885,15.25 123.885,15.488 ; UC72.13@123.779,15.744 cw(c123.523,15.488) 123.885,15.488 ; UC72.13@123.885,16.65 123.885,15.488 ; UC72.13@123.991,15.744 ccw(c124.247,15.488) 123.885,15.488
  Bottom Layer w0.3: CNC25.6@101.983,7.247 ccw(c100.83,8.4) 102.46,8.4 ccw(c104.09,8.4) CNC25.6@102.937,7.247 ; CNC25.6@102.195,7.035 ccw(c101.555,7.675) 102.46,7.675 ccw(c103.365,7.675) CNC25.6@102.725,7.035 ; CNC25.6@102.46,6.77 102.46,8.46 103.9,9.9 116.872,9.9 119.75,12.778 v1(119.75,14.25) ; v1@119.573,14.073 cw(c119.146,13.646) 119.75,13.646 cw(c120.354,13.646) v1@119.927,14.073